# Altium PCB Timer.PcbDoc
Units mm, origin at the board's own origin, x right, y up, seen from the top; angles counter-clockwise.
Board outline 97.37 x 63.5 mm, 2 copper layers (Top Layer, Bottom Layer); 28 components, 48 nets, 175 pads, 0 vias.
Unrouted connection lines stored in the file: 3.
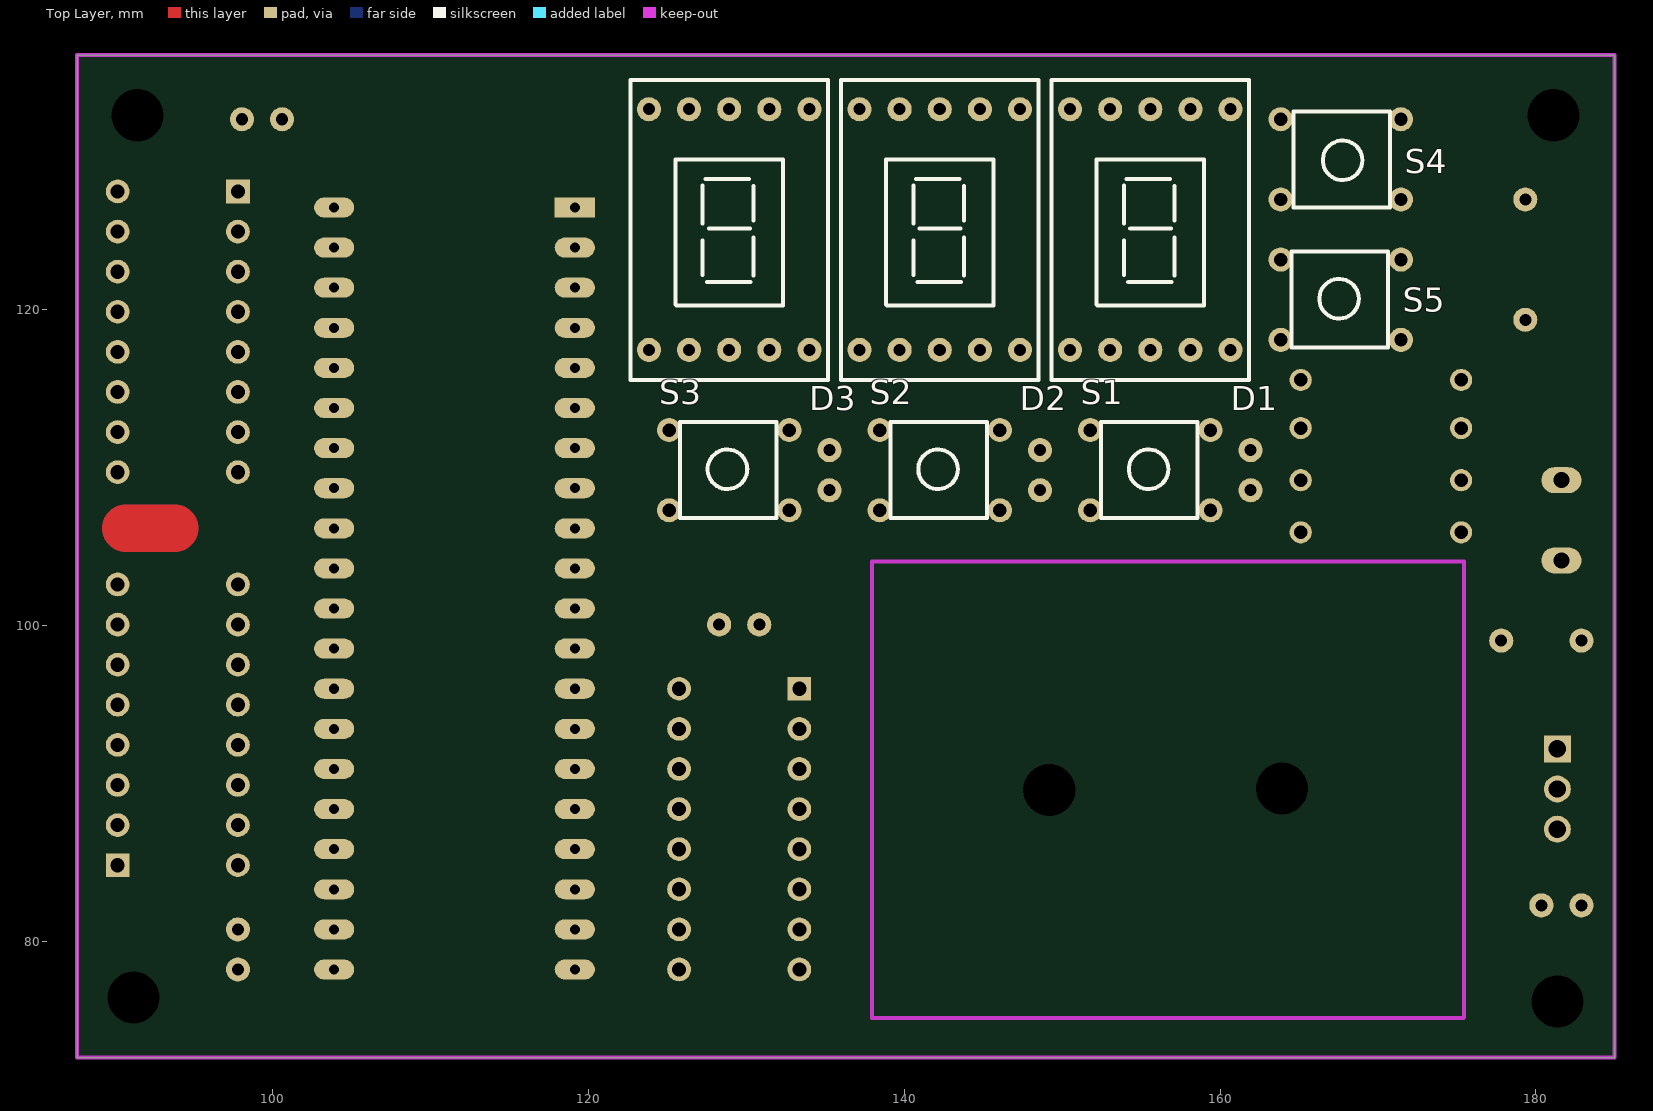
[diagram p0: Top Layer view]
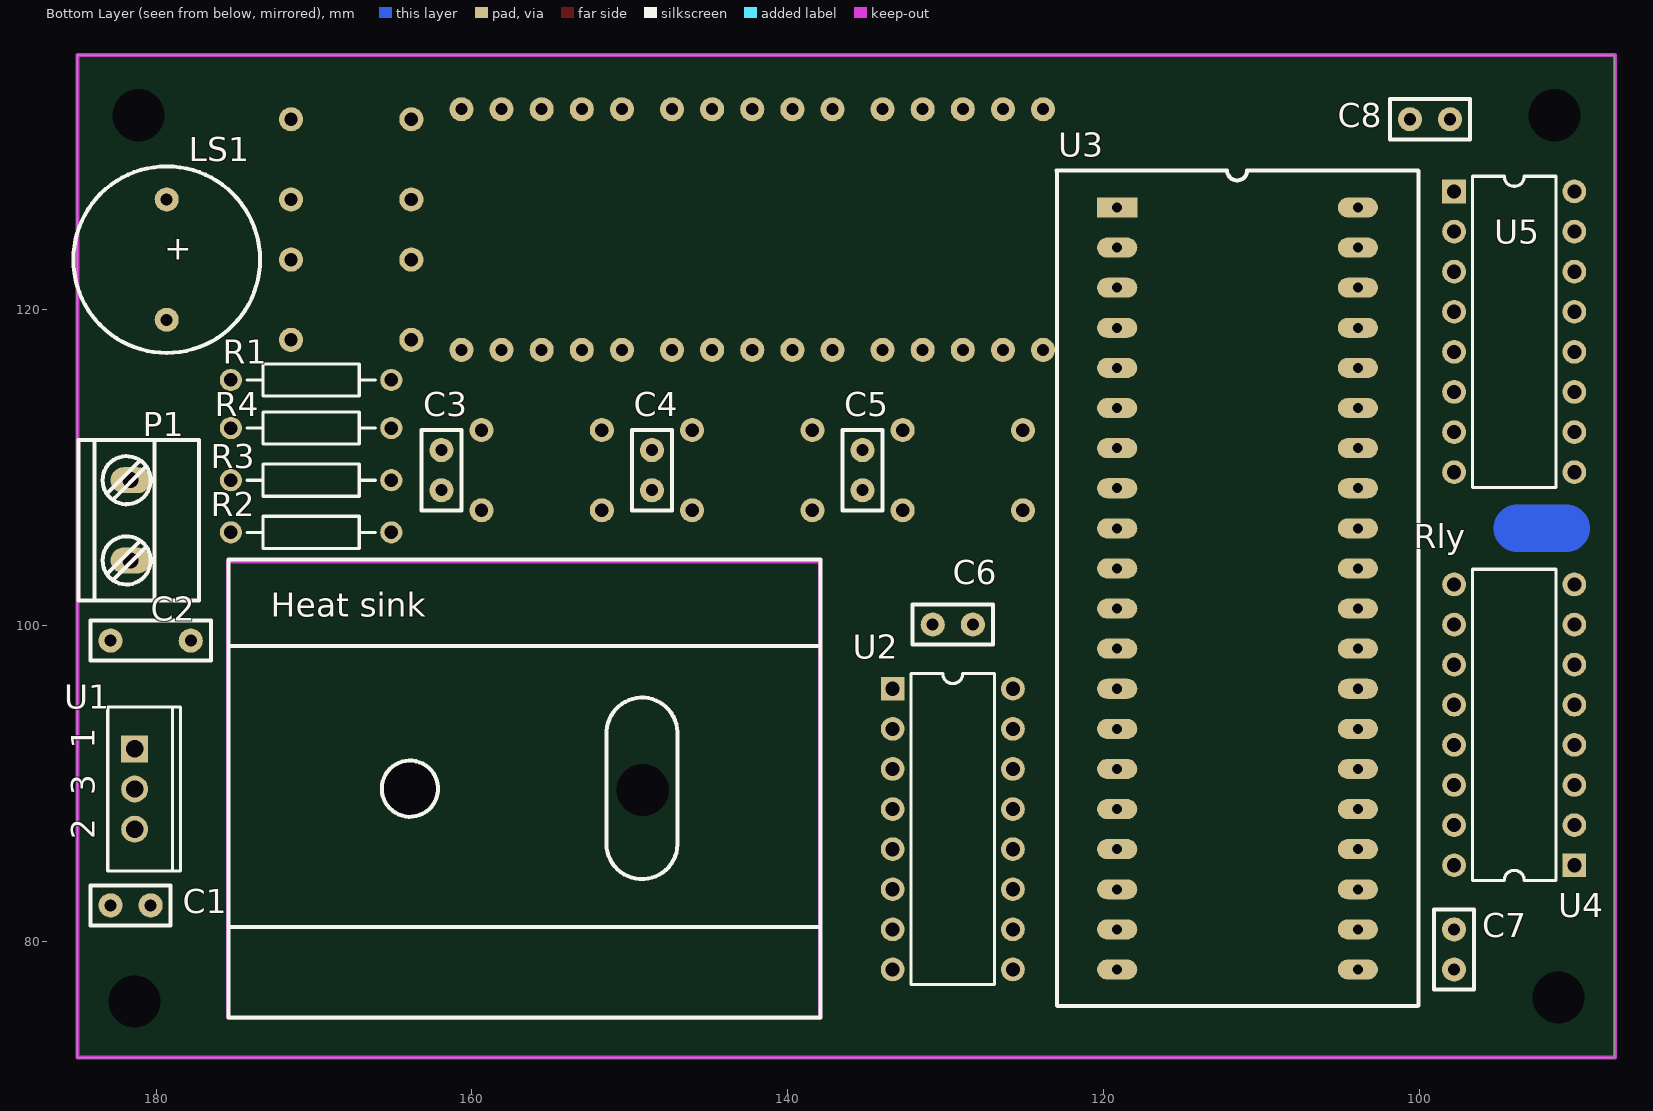
[diagram p1: Bottom Layer view, seen from below]

## Layer stack, top to bottom
Top Solder: solder mask 0.0102, Solder Resist, Dk 3.5
Top Layer: signal copper 0.0356
Dielectric 1: dielectric 0.32, FR-4, Dk 4.8
Bottom Layer: signal copper 0.0356
Bottom Solder: solder mask 0.0102, Solder Resist, Dk 3.5

## Board outline
87.63,136.144 136.398,136.144 185,136.144 185,72.644 136.398,72.644 87.63,72.644 87.63,105.41

## Design rules (kind name [scope] priority, off if disabled: settings)
Clearance [All] p1: gap=0.254
PolygonConnect [All] p1: connectstyle=Relief reliefconductorwidth=0.254 reliefentries=4 polygonreliefangle="90 Angle" airgapwidth=0.254
RoutingVias [All] p1: holewidth=0.711 width=1.27 viastyle="Through Hole" minholewidth=0.711 minwidth=1.27 maxholewidth=0.711 maxwidth=1.27
SolderMaskExpansion [All] p1: expansion=0.102
Width Width_pwr [InNet('12V') or InNet('GND') or InNet('VCC')] p1: maxlimit=1 minlimit=0.8 preferedwidth=1
Width Width_1 [All] p2: maxlimit=0.254 minlimit=0.254 preferedwidth=0.254
30 further rules are at their usual default settings.

## Components (designator, comment, footprint, x,y, rotation, side; value= is the part's Value field where it differs from the comment)
C1 "100n" "cap 100mil" 182.88,82.296 r180 bottom
C2 "330n" "cap 5mm" 177.8,99.06 r0 bottom
C3 "100n" "cap 100mil" 161.925,111.125 r270 bottom
C4 "100n" "cap 100mil" 148.59,111.125 r270 bottom
C5 "100n" "cap 100mil" 135.255,111.125 r270 bottom
C6 "100n" "cap 100mil" 130.81,100.076 r180 bottom
C7 "100n" "cap 100mil" 97.79,78.232 r90 bottom
C8 "100n" "cap 100mil" 98.044,132.08 r0 bottom
D1 "7_seg_disp" "Seven segment display" 150.495,117.475 r0 top
D2 "7_seg_disp" "Seven segment display" 137.16,117.475 r0 top
D3 "7_seg_disp" "Seven segment display" 123.825,117.475 r0 top
"Heat sink" "Comment" "Heat sink" 137.922,75.184 r90 bottom
LS1 "Buzzer" Buzzer 179.324,123.19 r90 bottom
P1 "Sorkapocs 5mm" SORKAPOCS-2 181.61,104.14 r0 bottom
R1 "75R" AXIAL-0.4 170.18,115.57 r180 bottom
R2 "330R" AXIAL-0.4 170.18,105.918 r0 bottom
R3 "330R" AXIAL-0.4 170.18,109.22 r0 bottom
R4 "330R" AXIAL-0.4 170.18,112.522 r0 bottom
S1 "Pushbutton" Pushbutton 151.765,107.315 r90 top
S2 "Pushbutton" Pushbutton 138.43,107.315 r90 top
S3 "Pushbutton" Pushbutton 125.095,107.315 r90 top
S4 "Pushbutton" Pushbutton 171.45,132.08 r270 top
S5 "Pushbutton" Pushbutton 163.83,118.11 r90 top
U1 "L7805CV" TO220ABN 181.356,89.662 r270 bottom
U2 "SN74LS47N" 648-08 129.54,87.122 r270 bottom
U3 "STM32F103 breakout board" "STM32 BLUE PILL" 119.126,126.492 r180 bottom
U4 "SN74LS47N" 648-08 93.98,93.726 r90 bottom
U5 "SN74LS47N" 648-08 93.98,118.618 r270 bottom

## Footprints (in the part's own frame and the unit in brackets; to place one, negate y for a bottom-side part, rotate by r counter-clockwise, add the part's x,y. Pads: shape width x height; smd on the part's side, far side on the other; paste and mask are expansions set on the pad)
648-08 [mm] "DIP; 16 Leads; Row Spacing 7.62 mm; Pitch 2.54 mm"
  rect 1.5x1.5 hole 0.9: 1(-8.89,-3.81)
  round 1.5 hole 0.9: 2(-6.35,-3.81) 3(-3.81,-3.81) 4(-1.27,-3.81) 5(1.27,-3.81) 6(3.81,-3.81) 7(6.35,-3.81) 8(8.89,-3.81) 9(8.89,3.81) 10(6.35,3.81) 11(3.81,3.81) 12(1.27,3.81) 13(-1.27,3.81) 14(-3.81,3.81) 15(-6.35,3.81) 16(-8.89,3.81)
  silkscreen extent -9.85,-2.65 9.85,2.65
AXIAL-0.4 [mm] "Axial Device, Thru-Hole; 2 Leads; 0.4 in Pin Spacing"
  round 1.4 hole 0.85: 1(-5.08,0) 2(5.08,0)
  silkscreen extent -4.06,-1.02 4.06,1.02
Buzzer [mil]
  round 60 hole 30: 1(-150,0) 2(150,0)
  silkscreen extent -233,-233 233,233
"cap 5mm" [mil]
  round 60 hole 30: 1(0,0) 2(200,0)
  silkscreen extent -50,-50 250,50
"cap 100mil" [mil]
  round 60 hole 30: 1(0,0) 2(100,0)
  silkscreen extent -50,-50 150,50
"Heat sink" [mm] "Heat sink for LTO220"
  round 0 hole 3.3 unplated: 1(14.5,26) 2(14.425,11.25)
  Keep-Out Layer lines w0.254: 28.875,37.525 0.025,37.525 -0.025,37.475 -0.025,0.025 28.875,0.025 28.875,37.525 ; 28.875,37.525 28.875,37.525
  silkscreen extent 0,0 29,37.5
Pushbutton [mil] "TACT-613N-F"
  round 60 hole 33.46: 1(0,0) 2(0,-300) 3(200,-300) 4(200,0)
  silkscreen extent -20,-268 220,-28
"Seven segment display" [mil]
  round 60 hole 30: 1(0,0) 2(100,0) 3(200,0) 4(300,0) 5(400,0) 6(400,600) 7(300,600) 8(200,600) 9(100,600) 10(0,600)
  silkscreen extent -46,-75 446,673
SORKAPOCS-2 [mil]
  oval 100x65 hole 40: 1(0,0) 2(0,-200)
  silkscreen extent -170,-300 130,100
"STM32 BLUE PILL" [mm]
  rect 2.54x1.27 hole 0.635: 1(0,0)
  oval 2.54x1.27 hole 0.635: 2(0,-2.54) 3(0,-5.08) 4(0,-7.62) 5(0,-10.16) 6(0,-12.7) 7(0,-15.24) 8(0,-17.78) 9(0,-20.32) 10(0,-22.86) 11(0,-25.4) 12(0,-27.94) 13(0,-30.48) 14(0,-33.02) 15(0,-35.56) 16(0,-38.1) 17(0,-40.64) 18(0,-43.18) 19(0,-45.72) 20(0,-48.26) 21(15.24,-48.26) 22(15.24,-45.72) 23(15.24,-43.18) 24(15.24,-40.64) 25(15.24,-38.1) 26(15.24,-35.56) 27(15.24,-33.02) 28(15.24,-30.48) 29(15.24,-27.94) 30(15.24,-25.4) 31(15.24,-22.86) 32(15.24,-20.32) 33(15.24,-17.78) 34(15.24,-15.24) 35(15.24,-12.7) 36(15.24,-10.16) 37(15.24,-7.62) 38(15.24,-5.08) 39(15.24,-2.54) 40(15.24,0)
  silkscreen extent -3.85,-50.58 19.07,2.35
TO220ABN [mm] "TO, Thru-Hole, Vertical, Heatsink Mounted; 3 In-Line Leads; Pitch 2.54 mm; Pin sequence 1, 3, 2"
  rect 1.7x1.7 hole 1.1: 1(-2.54,0)
  round 1.7 hole 1.1: 2(2.54,0) 3(0,0)
  silkscreen extent -5.2,-1.7 5.2,2.9

## Part data
C1 C2 C3 C4 C5 C6 C7 C8: library part Cap, "Capacitor"
LS1: "Magnetic Transducer Buzzer"
P1: library part "Header 2", "Header, 2-Pin"
R1 R2 R3 R4: library part Res1, "Resistor"
S1 S2 S3 S4 S5: library part "Tactile switch", "FSM2JSMLS -  Tactile Switch, Illuminated, 24 V, 50 mA, 100 gf, SMD, FSMJSM Series"
U1: "Positive Voltage Regulator"
U2 U4 U5: "BCD to 7-Segment Decoder/Driver"

## Free pads (board coordinates)
  round 0 hole 3.3 unplated: ""(91.186,76.454) ""(91.44,132.334) ""(181.102,132.334) ""(181.356,76.2)

## Nets (pads, with @x,y where several pads share a name; then routed paths per layer and width w, separated by ;. In a path a pad name is that pad's centre, name@x,y a point inside that pad or via, vN(x,y) a via of type N, cw(c..) or ccw(c..) an arc to the next point about the centre after c; other vN are vias at no path point)
12V: C2.2 P1.2 U1.1
A1: D1.7 U2.13
A2: D2.7 U4.13
A3: D3.7 U5.13
B1: D1.6 U2.12
B2: D2.6 U4.12
B3: D3.6 U5.12
BCD1_A: U2.7 U3.5
BCD1_B: U2.1 U3.6
BCD1_C: U2.2 U3.7
BCD1_D: U2.6 U3.8
BCD2_A: U3.11 U4.7
BCD2_B: U3.12 U4.1
BCD2_C: U3.13 U4.2
BCD2_D: U3.14 U4.6
BCD3_A: U3.29 U5.7
BCD3_B: U3.30 U5.1
BCD3_C: U3.31 U5.2
BCD3_D: U3.32 U5.6
BTN1: C3.1 S1.3 S1.4 U3.25
BTN2: C4.1 S2.3 S2.4 U3.26
BTN3: C5.1 S3.3 S3.4 U3.27
BTN_START: S4.3 S4.4 U3.28
BUZZER: LS1.1 U3.15
C1: D1.4 U2.11
C2: D2.4 U4.11
C3: D3.4 U5.11
D1: D1.2 U2.10
D2: D2.2 U4.10
D3: D3.2 U5.10
DISPLAY_RESET: U2.4 U3.16 U4.4 U5.4
E1: D1.1 U2.9
E2: D2.1 U4.9
E3: D3.1 U5.9
F1: D1.9 U2.15
F2: D2.9 U4.15
F3: D3.9 U5.15
G1: D1.10 U2.14
G2: D2.10 U4.14
G3: D3.10 U5.14
GND: C1.1 C2.1 C6.1 C7.2 C8.2 P1.1 R1.2 U1.3 U2.8 U3.19 U4.8 U5.8
NetD1_8: D1.8 R2.1
NetD2_8: D2.8 R3.1
NetD3_8: D3.8 R4.1
NetLS1_2: LS1.2 R1.1
RELAY: U3.34 | length 0.8
  Bottom Layer w0.254: U3.34@103.124,111.252 U3.34
RESTART: S5.3 S5.4 U3.37
VCC: C1.2 C3.2 C4.2 C5.2 C6.2 C7.1 C8.1 D3.5 R2.2 R3.2 R4.2 S1.1 S1.2 S2.1 S2.2 S3.1 S3.2 S4.1 S4.2 S5.1 S5.2 U1.2 U2.16 U3.18 U4.16 U5.16
pads on no net: "Heat sink.1" "Heat sink.2" D1.3 D1.5 D2.3 D2.5 D3.3 U2.3 U2.5 U3.1 U3.2 U3.3 U3.4 U3.9 U3.10 U3.17 U3.20 U3.21 U3.22 U3.23 U3.24 U3.33 U3.35 U3.36 U3.38 U3.39 U3.40 U4.3 U4.5 U5.3 U5.5

## Keep-outs
Keep-Out Layer:
  lines w0.254: 87.605,72.644 111.95,72.644 160.642,72.644 184.988,72.644 184.988,136.144 87.605,136.144 87.605,131.245 87.605,123.733 87.605,119.977 87.605,89.929 87.605,72.644

## Other copper
Multi-Layer:
  lines w3: 90.678,106.172 93.792,106.172

## Silkscreen, mask and mechanical layers (free items; w line width, h text height)
Bottom Overlay:
  text "+" at 179.476,123.19 h1.52
  text "Rly" at 100.33,104.902 h1.52

## Text inside footprints (layer, text, board x,y; h text height)
U1: Bottom Overlay "3" at 183.896,89.281 h1.5 r270; Bottom Overlay "2" at 183.896,86.487 h1.5 r270; Bottom Overlay "1" at 183.896,92.202 h1.5 r270